# EAGLE board master_control_mega_shield (EAGLE 5.11)
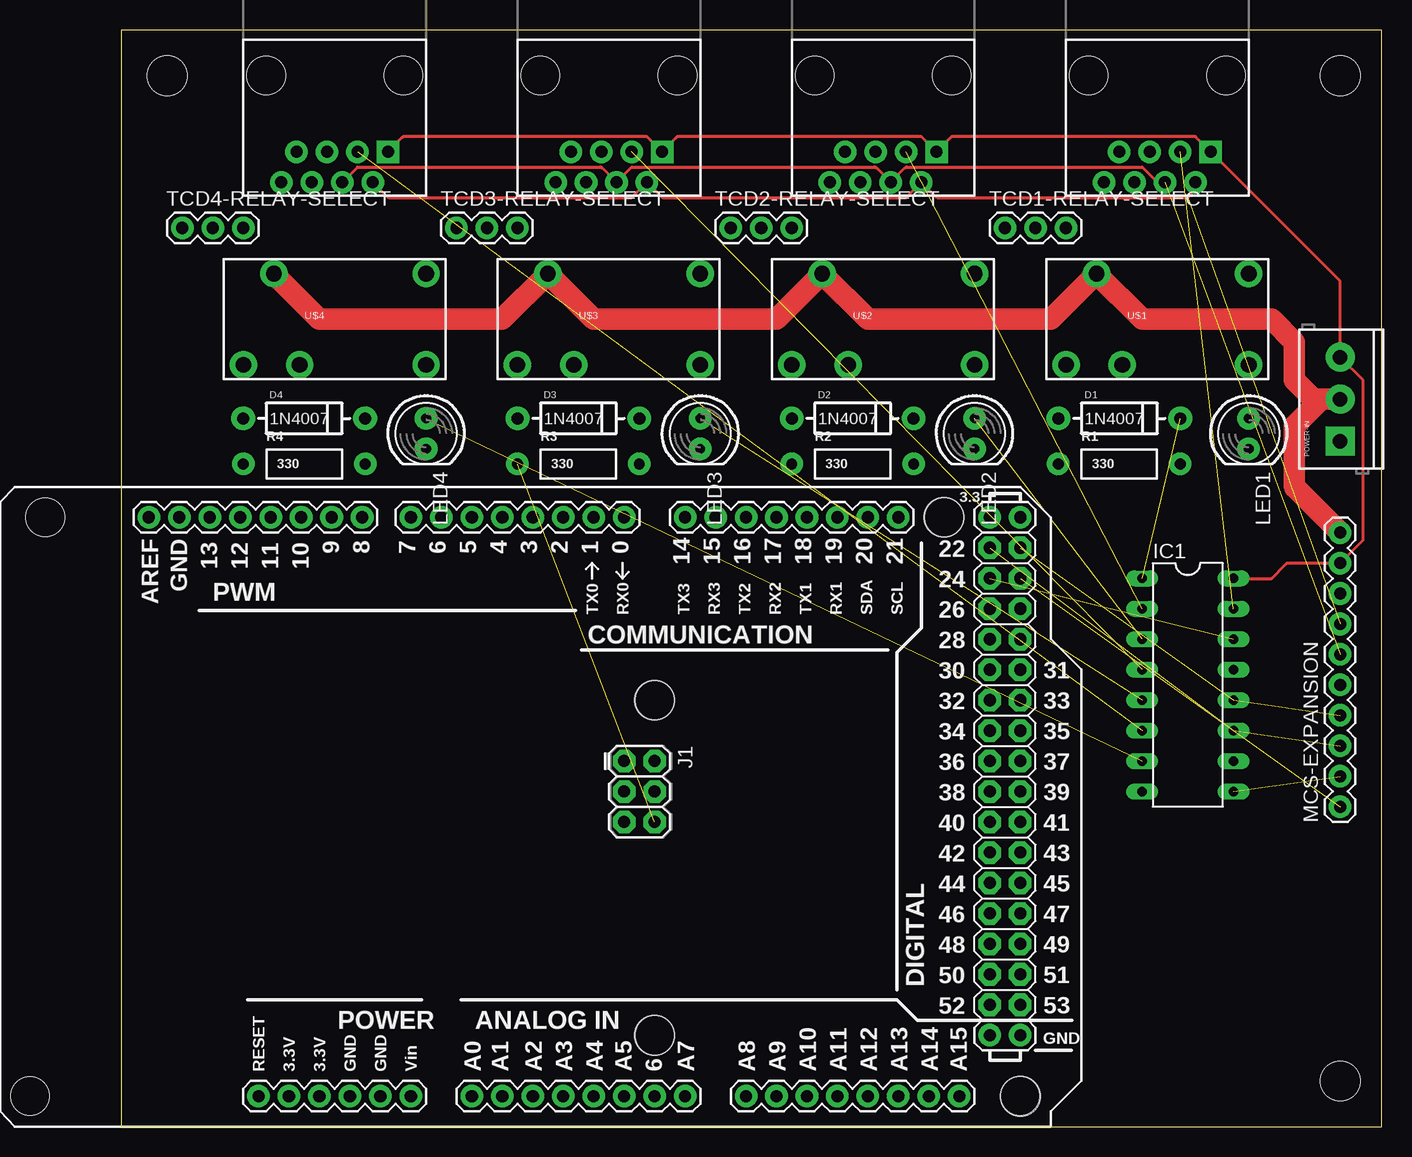
[diagram p0: board, top side]
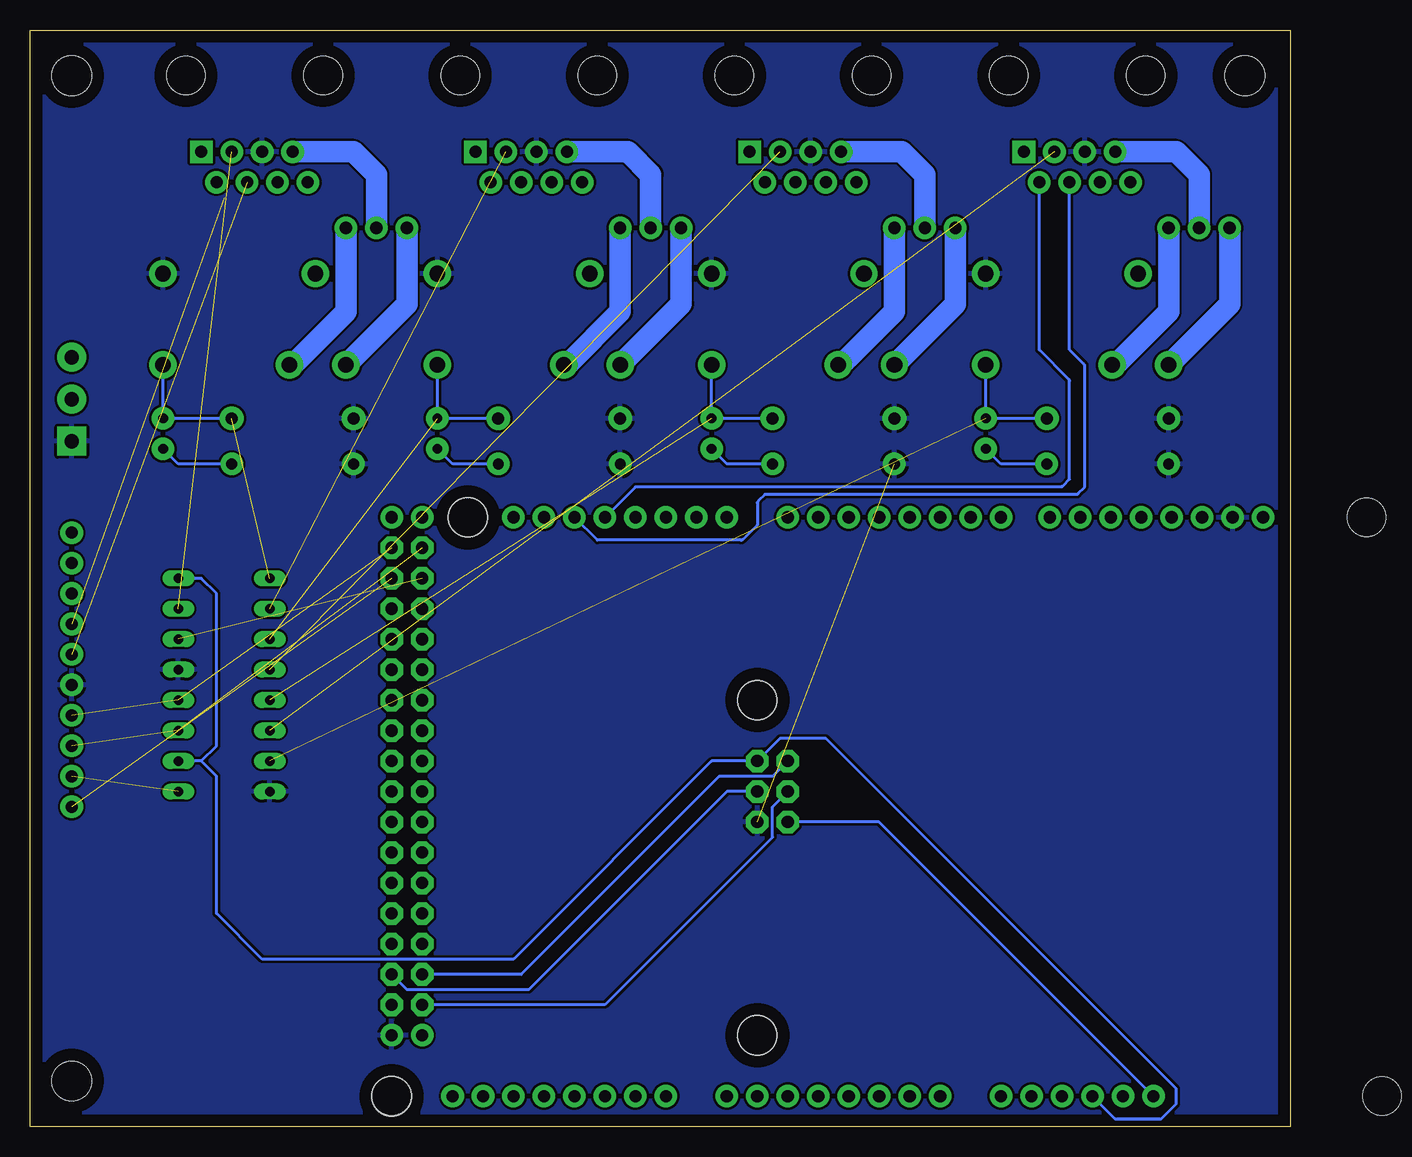
[diagram p1: board, bottom side, seen from below]

Size 105.08 x 91.43 mm. Coordinates in mm from the lower left corner, seen from the top.
Outline: 0,0 105.08,0 105.08,91.43 0,91.43 0,0
Copper layers (1*16): Top 0.035mm / dielectric 1.5mm / Bottom 0.035mm
Design rules "default": minimum track width 10mil, minimum drill 24mil, track to track 8mil, track to pad 8mil, pad to pad 8mil, via to via 8mil, smd to smd 8mil, copper to edge 40mil, drill to drill 8mil, minimum pad ring 10mil, minimum via ring 8mil, stop-mask expansion 4mil, vias tented up to drill 0mil, thermal gap 10mil
Net classes: 1 power: width 0.61 mm, clearance 0.406 mm; 2 signal: width 0.406 mm, clearance 0.305 mm; 3 ground: width 0.406 mm, drill 0.127 mm, clearance 0.254 mm to class 0, clearance 0.254 mm to class 1, clearance 0.254 mm to class 2

## Footprints (pad centres in the part's own frame; a part is rotated, then mirrored left to right if it is on the bottom)
DIODE-1N4001 = drill 1 pad 1.981 round: A -5.08,0; C 5.08,0
DIL16 = drill 0.813 long: 1 -8.89,-3.81; 2 -6.35,-3.81; 3 -3.81,-3.81; 4 -1.27,-3.81; 5 1.27,-3.81; 6 3.81,-3.81; 7 6.35,-3.81; 8 8.89,-3.81; 9 8.89,3.81; 10 6.35,3.81; 11 3.81,3.81; 12 1.27,3.81; 13 -1.27,3.81; 14 -3.81,3.81; 15 -6.35,3.81; 16 -8.89,3.81
2X3 = drill 1.016 pad 1.88 octagon: 1 0,0; 2 0,2.54; 3 2.54,0; 4 2.54,2.54; 5 5.08,0; 6 5.08,2.54
LED5MM = drill 0.813 pad 1.88 round: A -1.27,0; K 1.27,0
1X10 = drill 1.016 pad 1.88 round: 1 0,0; 2 2.54,0; 3 5.08,0; 4 7.62,0; 5 10.16,0; 6 12.7,0; 7 15.24,0; 8 17.78,0; 9 20.32,0; 10 22.86,0
SCREWTERMINAL-3.5MM-3 = drill 1.2 pad 2.413 square: 1 0,0 | drill 1.2 pad 2.413 round: 2 3.5,0; 3 7,0
AXIAL-0.4 = drill 0.9 pad 1.88 round: P$1 -5.08,0; P$2 5.08,0
RJ45-8 = drill 1 pad 1.88 square: 1 -4.445,6.35 | drill 1 pad 1.88 round: 2 -3.175,8.89; 3 -1.905,6.35; 4 -0.635,8.89; 5 0.635,6.35; 6 1.905,8.89; 7 3.175,6.35; 8 4.445,8.89 | hole 3.2: -5.715,0; 5.715,0
1X03 = drill 1.016 pad 1.88 round: 1 0,0; 2 2.54,0; 3 5.08,0
ARDUINO_MEGA_SHEILD = drill 1.016 pad 1.88 round: 0 52.07,50.8; 1 49.53,50.8; 2 46.99,50.8; 3 44.45,50.8; 3.3V 24.13,2.54; 4 41.91,50.8; 5 39.37,50.8; 5V@0 26.67,2.54; 5V@1 82.55,50.8; 5V@2 85.09,50.8; 6 36.83,50.8; 7 34.29,50.8; 8 30.226,50.8; 9 27.686,50.8; 10 25.146,50.8; 11 22.606,50.8; 12 20.066,50.8; 13 17.526,50.8; 14 57.15,50.8; 15 59.69,50.8; 16 62.23,50.8; 17 64.77,50.8; 18 67.31,50.8; 19 69.85,50.8; 20 72.39,50.8; 21 74.93,50.8; A0 39.37,2.54; A1 41.91,2.54; A2 44.45,2.54; A3 46.99,2.54; A4 49.53,2.54; A5 52.07,2.54; A6 54.61,2.54; A7 57.15,2.54; A8 62.23,2.54; A9 64.77,2.54; A10 67.31,2.54; A11 69.85,2.54; A12 72.39,2.54; A13 74.93,2.54; A14 77.47,2.54; A15 80.01,2.54; AREF 12.446,50.8; GND@0 29.21,2.54; GND@1 31.75,2.54; GND@2 82.55,7.62; GND@3 85.09,7.62; GND@4 14.986,50.8; RESET 21.59,2.54; VIN 34.29,2.54 | drill 1.016 pad 1.88 octagon: 22 82.55,48.26; 23 85.09,48.26; 24 82.55,45.72; 25 85.09,45.72; 26 82.55,43.18; 27 85.09,43.18; 28 82.55,40.64; 29 85.09,40.64; 30 82.55,38.1; 31 85.09,38.1; 32 82.55,35.56; 33 85.09,35.56; 34 82.55,33.02; 35 85.09,33.02; 36 82.55,30.48; 37 85.09,30.48; 38 82.55,27.94; 39 85.09,27.94; 40 82.55,25.4; 41 85.09,25.4; 42 82.55,22.86; 43 85.09,22.86; 44 82.55,20.32; 45 85.09,20.32; 46 82.55,17.78; 47 85.09,17.78; 48 82.55,15.24; 49 85.09,15.24; 50 82.55,12.7; 51 85.09,12.7; 52 82.55,10.16; 53 85.09,10.16 | hole 3.2: 3.81,50.8; 2.54,2.54; 54.61,35.56; 54.61,7.62; 78.74,50.8; 85.09,2.54
RELAY-JZC = drill 1.3 pad 2.286 round: 1 3.81,-8.89; 2 -3.81,1.651; 3 -3.81,6.35; 4 3.81,3.81; 5 -3.81,-8.89
STAND-OFF = hole 3.302: 0,0

## Placement (x,y rotation side)
D1  1N4007  [DIODE-1N4001]  83.19,59.05 0 top
D2  1N4007  [DIODE-1N4001]  60.96,59.05 0 top
D3  1N4007  [DIODE-1N4001]  38.1,59.05 0 top
D4  1N4007  [DIODE-1N4001]  15.24,59.05 0 top
IC1  74HC595N  [DIL16]  88.9,36.83 270 top
J1  ICSP  [2X3]  41.91,30.48 270 top
LED1  [LED5MM]  93.98,57.78 270 top
LED2  [LED5MM]  71.12,57.78 270 top
LED3  [LED5MM]  48.26,57.78 270 top
LED4  [LED5MM]  25.4,57.78 270 top
MCS-EXPANSION  M10"  [1X10]  101.6,26.67 90 top
POWER-IN  [SCREWTERMINAL-3.5MM-3]  101.6,57.15 90 top
R1  330  [AXIAL-0.4]  83.19,55.24 0 top
R2  330  [AXIAL-0.4]  60.96,55.24 0 top
R3  330  [AXIAL-0.4]  38.1,55.24 0 top
R4  330  [AXIAL-0.4]  15.24,55.24 0 top
TCD1  RJ45-8PTH  [RJ45-8]  86.36,87.63 180 top
TCD1-RELAY-SELECT  [1X03]  73.66,74.93 0 top
TCD2  RJ45-8PTH  [RJ45-8]  63.5,87.63 180 top
TCD2-RELAY-SELECT  [1X03]  50.8,74.93 0 top
TCD3  RJ45-8PTH  [RJ45-8]  40.64,87.63 180 top
TCD3-RELAY-SELECT  [1X03]  27.94,74.93 0 top
TCD4  RJ45-8PTH  [RJ45-8]  17.78,87.63 180 top
TCD4-RELAY-SELECT  [1X03]  5.08,74.93 0 top
U1  ARDUINO-MEGASHIELD  [ARDUINO_MEGA_SHEILD]  -10.16,0 0 top
U$1  RELAYPTH4  [RELAY-JZC]  85.09,67.31 90 top
U$2  RELAYPTH4  [RELAY-JZC]  62.23,67.31 90 top
U$3  RELAYPTH4  [RELAY-JZC]  39.37,67.31 90 top
U$4  RELAYPTH4  [RELAY-JZC]  16.51,67.31 90 top
U$5  [STAND-OFF]  3.81,87.63 0 top
U$6  [STAND-OFF]  101.6,87.63 0 top
U$7  [STAND-OFF]  101.6,3.81 0 top
U$8  [STAND-OFF]  44.45,35.56 0 top
U$9  [STAND-OFF]  68.58,50.8 0 top
U$10  [STAND-OFF]  44.45,7.62 0 top
U$11  [STAND-OFF]  74.93,2.54 0 top

## Library data of the parts
D1-D4 J1 LED1-LED4 MCS-EXPANSION POWER-IN R1-R4 TCD1 TCD1-RELAY-SELECT TCD2 TCD2-RELAY-SELECT TCD3 TCD3-RELAY-SELECT TCD4 TCD4-RELAY-SELECT U$1-U$11 = SparkFun
IC1 = 74xx-us
U1 = andrew

## Nets
+12V [signal]: MCS-EXPANSION.10 POWER-IN.2 U$1.4 U$2.4 U$3.4 U$4.4
GND: D1.A D2.A D3.A D4.A IC1.8 IC1.13 J1.6 MCS-EXPANSION.5 POWER-IN.1 R1.P$1 R2.P$1 R3.P$1 R4.P$1 TCD1.5 TCD2.5 TCD3.5 TCD4.5 U1.GND@3 U1.GND@4 U$1.1 U$2.1 U$3.1 U$4.1
MCS-RX: MCS-EXPANSION.6 TCD1.4 TCD2.4 TCD3.4 TCD4.4 U1.19
MCS-TX: MCS-EXPANSION.7 TCD1.2 TCD2.2 TCD3.2 TCD4.2 U1.18
N$1: LED1.K R1.P$2
N$2: LED2.K R2.P$2
N$3: LED3.K R3.P$2
N$4: LED4.K R4.P$2
PIN50: J1.1 U1.50
PIN51: J1.4 U1.51
PIN52: J1.3 U1.52
RESET: J1.5 U1.RESET
SHIFT-CLOCK: IC1.11 MCS-EXPANSION.3 U1.22
SHIFT-DATA: IC1.14 U1.24
SHIFT-INPUT: MCS-EXPANSION.1 U1.25
SHIFT-LATCH: IC1.12 MCS-EXPANSION.4 U1.23
SHIFT-OUTPUT: IC1.9 MCS-EXPANSION.2
TCD1-12V-STRIKE: TCD1-RELAY-SELECT.2 TCD1.7
TCD1-RELAY: D1.C IC1.1 LED1.A U$1.5
TCD1-RELAY-NC: TCD1-RELAY-SELECT.3 U$1.2
TCD1-RELAY-NO: TCD1-RELAY-SELECT.1 U$1.3
TCD1-SELECT: IC1.15 TCD1.3
TCD2-12V-STRIKE: TCD2-RELAY-SELECT.2 TCD2.7
TCD2-RELAY: D2.C IC1.3 LED2.A U$2.5
TCD2-RELAY-NC: TCD2-RELAY-SELECT.3 U$2.2
TCD2-RELAY-NO: TCD2-RELAY-SELECT.1 U$2.3
TCD2-SELECT: IC1.2 TCD2.3
TCD3-12V-STRIKE: TCD3-RELAY-SELECT.2 TCD3.7
TCD3-RELAY: D3.C IC1.5 LED3.A U$3.5
TCD3-RELAY-NC: TCD3-RELAY-SELECT.3 U$3.2
TCD3-RELAY-NO: TCD3-RELAY-SELECT.1 U$3.3
TCD3-SELECT: IC1.4 TCD3.3
TCD4-12V-STRIKE: TCD4-RELAY-SELECT.2 TCD4.7
TCD4-RELAY: D4.C IC1.7 LED4.A U$4.5
TCD4-RELAY-NC: TCD4-RELAY-SELECT.3 U$4.2
TCD4-RELAY-NO: TCD4-RELAY-SELECT.1 U$4.3
TCD4-SELECT: IC1.6 TCD4.3
VCC: IC1.10 IC1.16 J1.2 MCS-EXPANSION.9 POWER-IN.3 TCD1.1 TCD2.1 TCD3.1 TCD4.1 U1.5V@0

## Tracks (layer width: path | path; a pad name or v marks a point on that pad's centre or on a via)
+12V
  Top 1.778: U$4.4 16.44,67.38 arc45 16.61,67.31 31.75,67.31 U$3.4 39.37,67.31 54.61,67.31 U$2.4 62.23,67.31 77.47,67.31 U$1.4 85.09,67.31 95.89,67.31 97.79,65.41 97.79,62.23 99.37,60.65 POWER-IN.2 100.12,60.65 arc45 99.95,60.58 97.79,58.42 97.79,53.45 arc45 97.86,53.27 MCS-EXPANSION.10
GND  (1 unrouted)
  pour Bottom: 105.41,0 105.41,91.44 0,91.44 0,0
MCS-RX  (1 unrouted)
  Top 0.254: TCD1.4 86.47,78.74 arc-45 86.29,78.81 85.09,80.01 65.51,80.01 arc45 65.33,79.94 TCD2.4 62.94,79.94 arc45 62.76,80.01 42.55,80.01 TCD3.4 40.08,79.94 arc45 39.9,80.01 19.68,80.01 TCD4.4
  Bottom 0.254: U1.19 57.78,48.9 45.83,48.9 arc-45 45.65,48.97 44.45,50.16 44.45,51.97 arc45 44.38,52.14 43.81,52.7 17.89,52.7 arc-45 17.71,52.78 17.14,53.34 17.14,63.4 arc-45 17.22,63.57 18.41,64.77 TCD4.4
MCS-TX  (1 unrouted)
  Top 0.254: TCD1.2 89.53,78.21 arc-45 89.46,78.03 88.9,77.47 68.05,77.47 arc-45 67.87,77.54 TCD2.2 65.41,77.47 45.19,77.47 arc-45 45.01,77.54 TCD3.2 42.55,77.47 22.33,77.47 arc-45 22.15,77.54 TCD4.2
  Bottom 0.254: U1.18 54.61,53.34 19.16,53.34 arc-45 18.98,53.41 18.41,53.98 18.41,62.12 arc-45 18.49,62.3 20.95,64.77 TCD4.2
N$1
  Bottom 0.254: R1.P$2 92.71,55.24 LED1.K
N$2
  Bottom 0.254: R2.P$2 69.85,55.24 LED2.K
N$3
  Bottom 0.254: R3.P$2 46.99,55.24 LED3.K
N$4
  Bottom 0.254: R4.P$2 24.13,55.24 LED4.K
PIN50
  Bottom 0.254: U1.50 64.14,12.7 47.62,29.21 43.18,29.21 J1.1
PIN51
  Bottom 0.254: J1.4 46.99,27.94 63.5,11.43 73.66,11.43 U1.51
PIN52
  Bottom 0.254: U1.52 57.15,10.16 43.18,24.13 43.18,26.67 J1.3
RESET
  Bottom 0.254: J1.5 34.29,25.4 U1.RESET
SHIFT-CLOCK  (2 unrouted)
SHIFT-DATA  (1 unrouted)
SHIFT-INPUT  (1 unrouted)
SHIFT-LATCH  (2 unrouted)
SHIFT-OUTPUT  (1 unrouted)
TCD1-12V-STRIKE
  Bottom 1.778: TCD1-RELAY-SELECT.2 76.2,79.38 78.11,81.28 TCD1.7
TCD1-RELAY  (1 unrouted)
  Bottom 0.254: D1.C LED1.A U$1.5
TCD1-RELAY-NC
  Bottom 1.778: U$1.2 83.19,63.5 78.74,67.94 TCD1-RELAY-SELECT.3
TCD1-RELAY-NO
  Bottom 1.778: U$1.3 73.66,68.58 TCD1-RELAY-SELECT.1
TCD1-SELECT  (1 unrouted)
TCD2-12V-STRIKE
  Bottom 1.778: TCD2-RELAY-SELECT.2 53.34,79.38 55.24,81.28 TCD2.7
TCD2-RELAY  (1 unrouted)
  Bottom 0.254: D2.C LED2.A U$2.5
TCD2-RELAY-NC
  Bottom 1.778: U$2.2 60.33,63.5 55.88,67.94 TCD2-RELAY-SELECT.3
TCD2-RELAY-NO
  Bottom 1.778: U$2.3 50.8,68.58 TCD2-RELAY-SELECT.1
TCD2-SELECT  (1 unrouted)
TCD3-12V-STRIKE
  Bottom 1.778: TCD3-RELAY-SELECT.2 30.48,79.38 32.38,81.28 TCD3.7
TCD3-RELAY  (1 unrouted)
  Bottom 0.254: U$3.5 LED3.A D3.C
TCD3-RELAY-NC
  Bottom 1.778: U$3.2 37.47,63.5 33.02,67.94 TCD3-RELAY-SELECT.3
TCD3-RELAY-NO
  Bottom 1.778: U$3.3 27.94,68.58 TCD3-RELAY-SELECT.1
TCD3-SELECT  (1 unrouted)
TCD4-12V-STRIKE
  Bottom 1.778: TCD4-RELAY-SELECT.2 7.62,79.38 9.53,81.28 TCD4.7
TCD4-RELAY  (1 unrouted)
  Bottom 0.254: D4.C LED4.A U$4.5
TCD4-RELAY-NC
  Bottom 1.778: U$4.2 14.61,63.5 10.16,67.94 TCD4-RELAY-SELECT.3
TCD4-RELAY-NO
  Bottom 1.778: U$4.3 5.08,68.58 TCD4-RELAY-SELECT.1
TCD4-SELECT  (1 unrouted)
VCC
  Top 0.254: TCD4.1 23.42,82.48 arc-45 23.6,82.55 43.81,82.55 TCD3.1 46.28,82.48 arc-45 46.46,82.55 66.67,82.55 TCD2.1 69.14,82.48 arc-45 69.32,82.55 89.53,82.55 TCD1.1 101.6,70.48 POWER-IN.3 arc45 101.61,64.12 103.5,62.23 103.5,48.9 MCS-EXPANSION.9 97.26,46.99 arc45 97.08,46.92 95.89,45.72 IC1.16
  Bottom 0.254: U1.5V@0 14.61,0.64 10.79,0.64 9.53,1.91 9.53,3.17 38.73,32.38 42.55,32.38 J1.2 48.26,30.48 64.77,13.97 85.72,13.97 89.53,17.78 89.53,29.21 90.81,30.48 | IC1.16 90.81,45.72 89.53,44.45 89.53,31.75 90.81,30.48 | 90.81,30.48 IC1.10